# Altium PCB PCB_2_layers.PcbDoc
Units mil, origin at the board's own origin, x right, y up, seen from the top; angles counter-clockwise.
Board outline 1535 x 930 mil, 2 copper layers (Top Layer, Bottom Layer); 12 components, 8 nets, 36 pads, 6 vias.
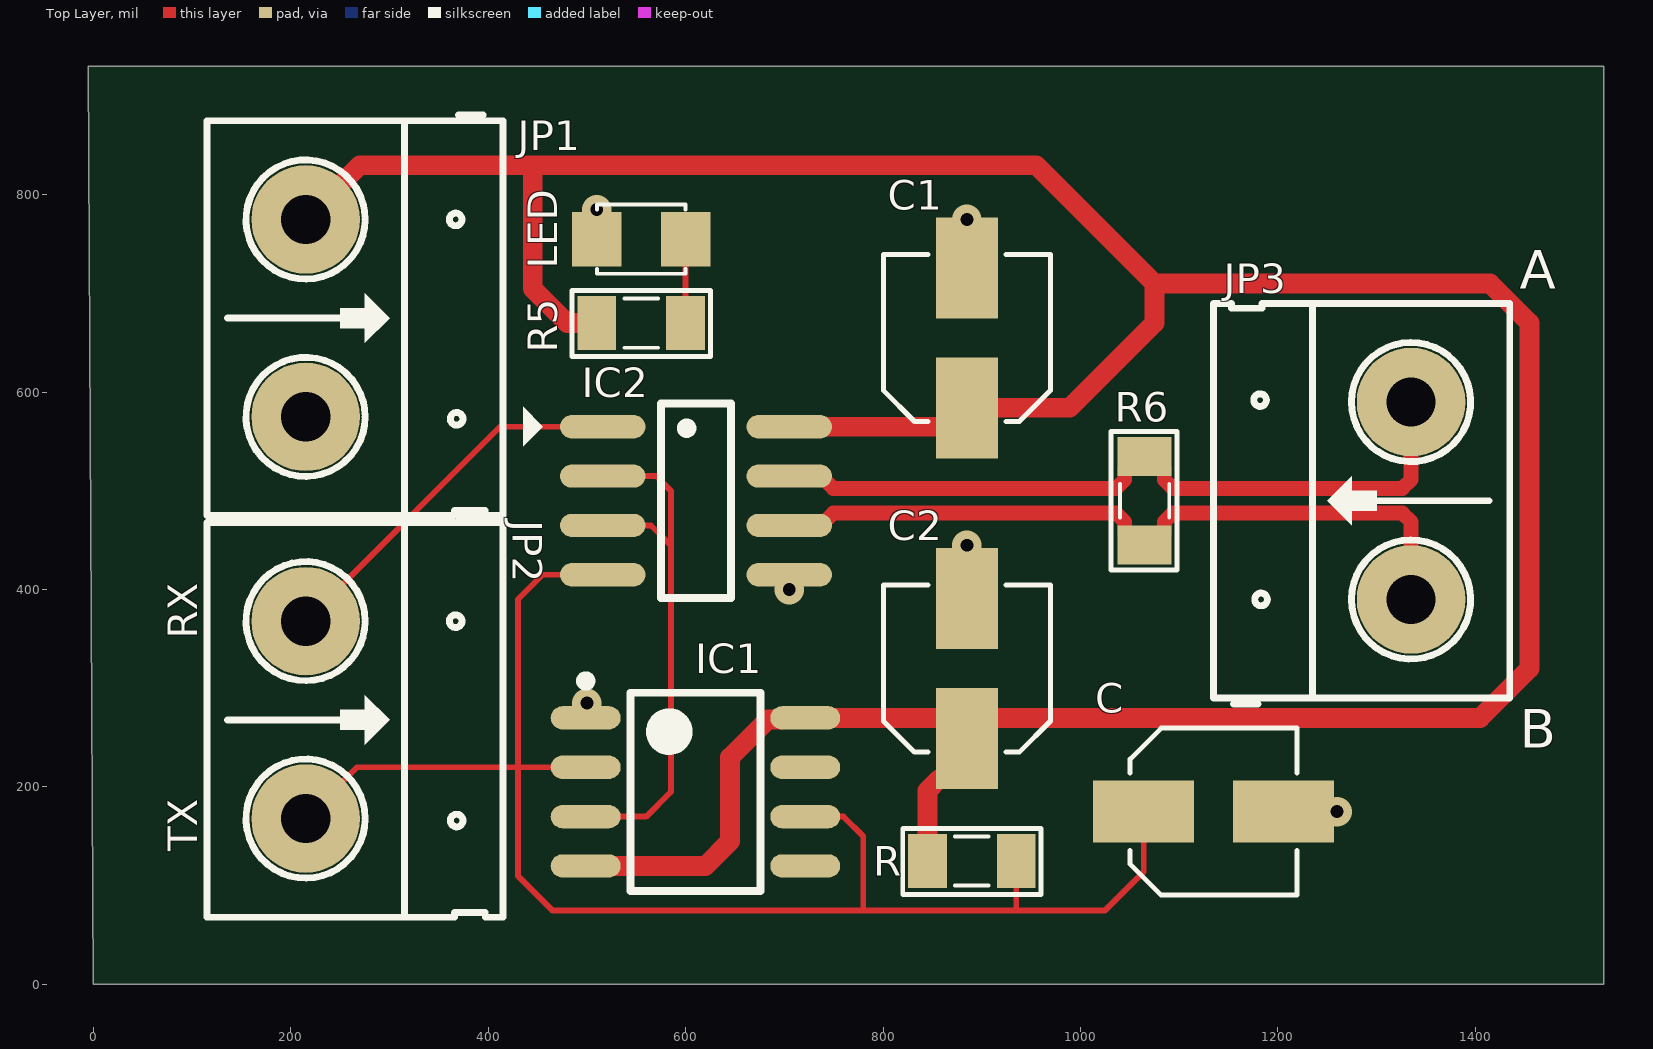
[diagram p0: Top Layer view]
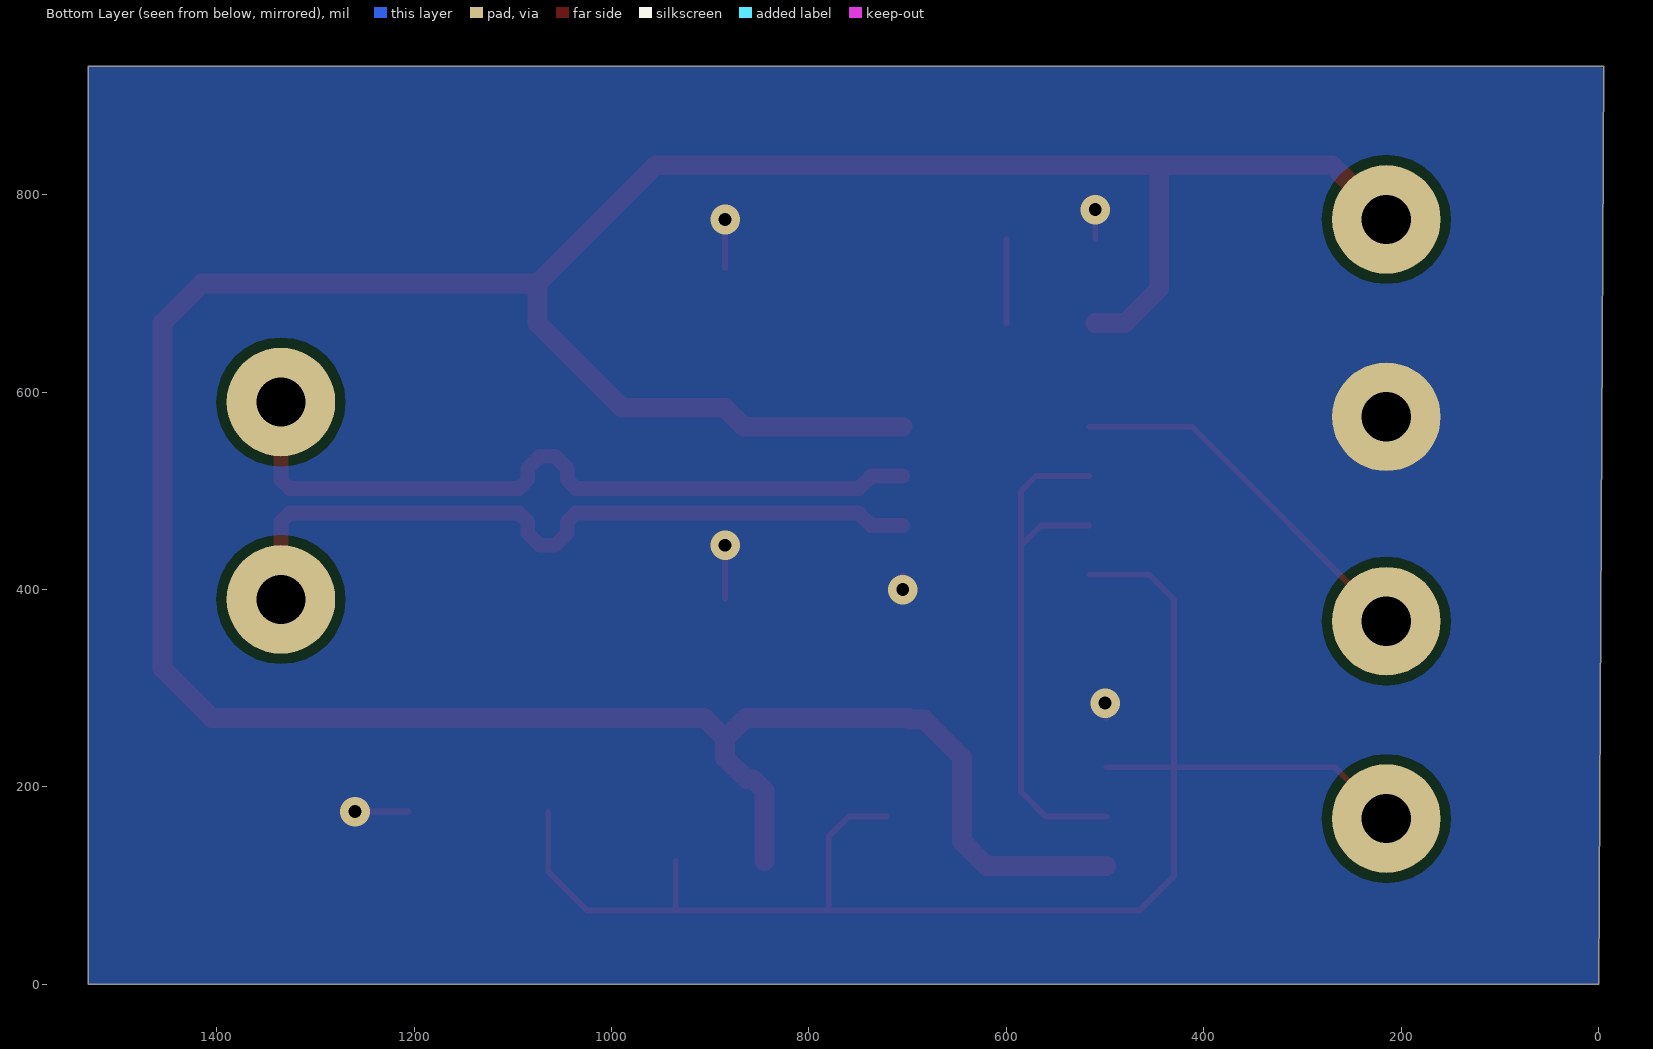
[diagram p1: Bottom Layer view, seen from below]
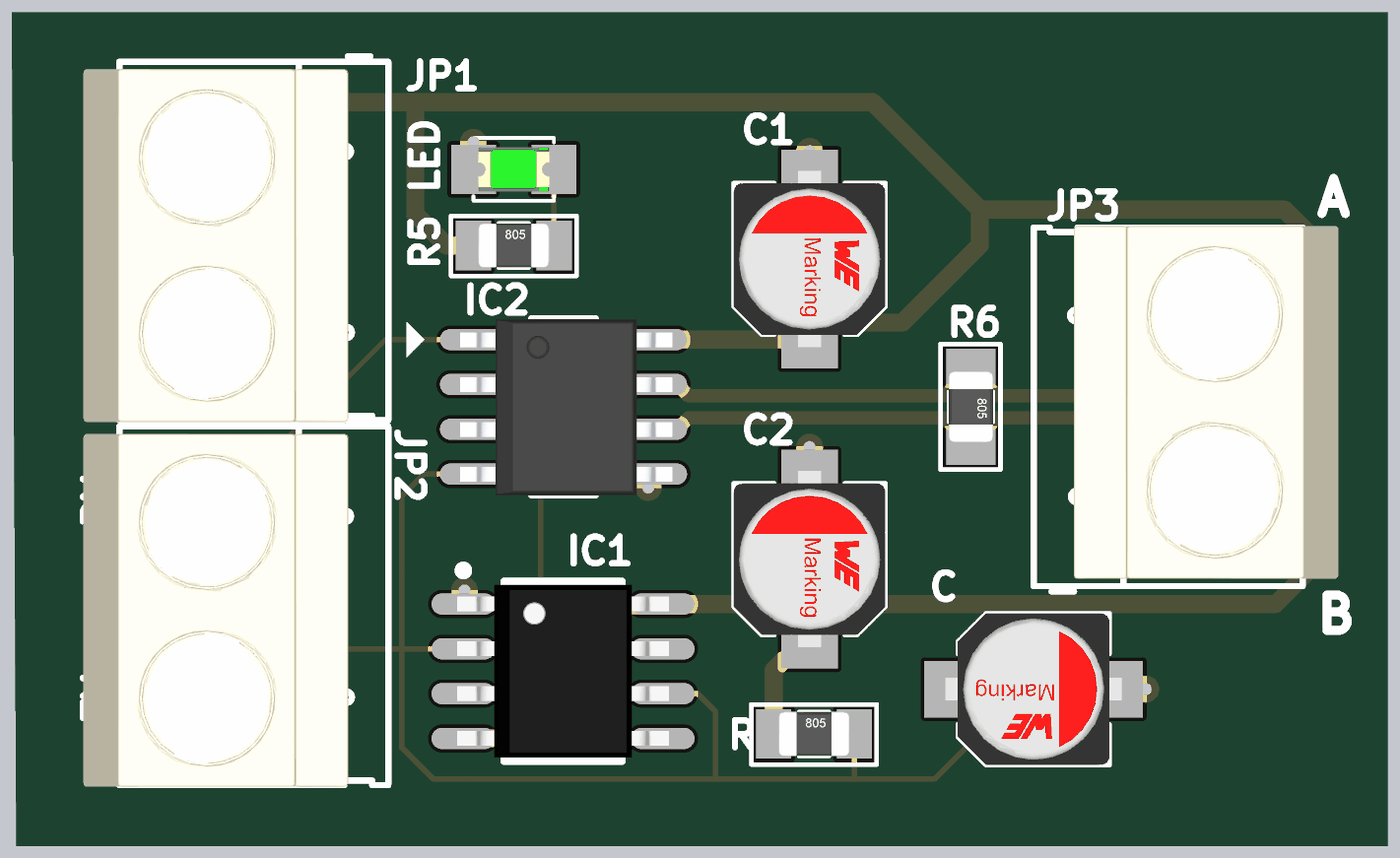
[diagram p2: 3D render of the assembled board from above, using the file's embedded part models]

## Layer stack, top to bottom
Top Solder: solder mask 0.4, Solder Resist, Dk 3.5
Top Layer: signal copper 1.4
Dielectric 1: dielectric 12.6, FR-4, Dk 4.8
Bottom Layer: signal copper 1.4
Bottom Solder: solder mask 0.4, Solder Resist, Dk 3.5

## Board outline
0,0 1530,0 1530,930 -5,930

## Design rules (kind name [scope] priority, off if disabled: settings)
Clearance Clearance_4 [InNamedPolygon('Bottom Layer-No Net')] p1: gap=10 ignorepadtopadclearanceinfootprint=FALSE except(0: Arc-Hole Track-Hole SMDPad-Hole THPad-Hole Via-Hole Fill-Hole Poly-Hole Region-Hole Text-Hole; 30: Arc-Fill Arc-Poly Arc-Region Track-Fill Track-Poly Track-Region Via-Fill Via-Poly Via-Region Fill-Fill Fill-Poly Fill-Region Poly-Poly Poly-Region Region-Region)
Clearance Clearance_3 [InNamedPolygon('Bottom Layer-No Net')] p2: gap=10 ignorepadtopadclearanceinfootprint=FALSE except(0: Arc-Hole Track-Hole SMDPad-Hole THPad-Hole Via-Hole Fill-Hole Poly-Hole Region-Hole Text-Hole; 20: Arc-Fill Arc-Poly Arc-Region Track-Fill Track-Poly Track-Region Via-Fill Via-Poly Via-Region Fill-Fill Fill-Poly Fill-Region Poly-Poly Poly-Region Region-Region)
Clearance Clearance_2 [InNamedPolygon('Bottom Layer-GND')] p3: gap=10 ignorepadtopadclearanceinfootprint=FALSE except(0: Arc-Hole Track-Hole SMDPad-Hole THPad-Hole Via-Hole Fill-Hole Poly-Hole Region-Hole Text-Hole; 39.37: Arc-Fill Arc-Poly Arc-Region Track-Fill Track-Poly Track-Region Via-Fill Via-Poly Via-Region Fill-Fill Fill-Poly Fill-Region Poly-Poly Poly-Region Region-Region)
Clearance Clearance_1 [InNamedPolygon('Bottom Layer-GND')] p4: gap=10 ignorepadtopadclearanceinfootprint=FALSE except(0: Arc-Hole Track-Hole SMDPad-Hole THPad-Hole Via-Hole Fill-Hole Poly-Hole Region-Hole Text-Hole; 39.37: Arc-Fill Arc-Poly Arc-Region Track-Fill Track-Poly Track-Region Via-Fill Via-Poly Via-Region Fill-Fill Fill-Poly Fill-Region Poly-Poly Poly-Region Region-Region)
Clearance [All] p5: gap=10 ignorepadtopadclearanceinfootprint=FALSE except(0: Arc-Hole Track-Hole SMDPad-Hole THPad-Hole Via-Hole Fill-Hole Poly-Hole Region-Hole Text-Hole)
DiffPairsRouting [All] p1: maxlimit=10 minlimit=10 mostfreqgap=10 toplayer_minwidth=15 toplayer_maxwidth=15 toplayer_prefwidth=15 bottomlayer_minwidth=15 bottomlayer_maxwidth=15 bottomlayer_prefwidth=15 maxuncoupledlength=500
PolygonConnect PolygonConnect_6 [All vs IsNamedPolygon('Bottom Layer-No Net')] p1: connectstyle=Direct reliefconductorwidth=10 reliefentries=4 polygonreliefangle="90 Angle" airgapwidth=10
PolygonConnect PolygonConnect_5 [All vs IsNamedPolygon('Bottom Layer-No Net')] p2: connectstyle=Relief reliefconductorwidth=20 reliefentries=4 polygonreliefangle="90 Angle" airgapwidth=10
PolygonConnect PolygonConnect_4 [All vs IsNamedPolygon('Bottom Layer-No Net')] p3: connectstyle=Relief reliefconductorwidth=20 reliefentries=4 polygonreliefangle="90 Angle" airgapwidth=20
PolygonConnect PolygonConnect_3 [All vs IsNamedPolygon('Bottom Layer-No Net')] p4: connectstyle=Relief reliefconductorwidth=10 reliefentries=4 polygonreliefangle="90 Angle" airgapwidth=20
PolygonConnect PolygonConnect_2 [All vs IsNamedPolygon('Bottom Layer-GND')] p5: connectstyle=Relief reliefconductorwidth=78.74 reliefentries=4 polygonreliefangle="90 Angle" airgapwidth=39.37
PolygonConnect PolygonConnect_1 [All vs IsNamedPolygon('Bottom Layer-GND')] p6: connectstyle=Relief reliefconductorwidth=78.74 reliefentries=4 polygonreliefangle="90 Angle" airgapwidth=39.37
PolygonConnect [All] p7: connectstyle=Relief reliefconductorwidth=10 reliefentries=4 polygonreliefangle="90 Angle" airgapwidth=10
RoutingVias [All] p1: holewidth=28 width=50 viastyle="Through Hole" minholewidth=28 minwidth=50 maxholewidth=28 maxwidth=50
SolderMaskExpansion [All] p1: expansion=4
Width [All] p1: maxlimit=78.74 minlimit=6 preferedwidth=39.37 toplayer_maxwidth=30 toplayer_prefwidth=20 bottomlayer_minwidth=19.68 minimp=50.000000 maximp=50.000000 favimp=50.000000
29 further rules are at their usual default settings.

## Classes and differential pairs
differential pair class RS485_DIFFPAIR: RS485
component class Schematic: C C1 C2 IC2 JP1 JP2 JP3 LED R R5 R6
differential pair RS485: +RS485_P -RS485_N

## Components (designator, comment, footprint, x,y, rotation, side; value= is the part's Value field where it differs from the comment)
C "22uF" CAP-ALU-SMD-4.5x5x1.4 1135,175 r0 top
C1 "22uF" CAP-ALU-SMD-4.5x5x1.4 885,655 r90 top
C2 "22uF" CAP-ALU-SMD-4.5x5x1.4 885,320 r90 top
IC1 "LM555" SO8 610,195 r0 top
IC2 "MAX485" SO-8 610.51,490 r0 top
JP1 "Header 2_1" HED2 215,775 r270 top value="Header 2"
JP2 "Header 2_1" HED2 215,368 r270 top value="Header 2"
JP3 "Header 2_1" HED2 1335,390 r90 top value="Header 2"
LED "LED SMD" SM-LED-0805-Green 600,755 r180 top
R "100" RES-SMD-0805 890,125 r0 top
R5 "220" RES-SMD-0805 555,670 r0 top
R6 "120" RES-SMD-0805 1065,490 r270 top

## Footprints (in the part's own frame and the unit in brackets; to place one, negate y for a bottom-side part, rotate by r counter-clockwise, add the part's x,y. Pads: shape width x height; smd on the part's side, far side on the other; paste and mask are expansions set on the pad)
CAP-ALU-SMD-4.5x5x1.4 [mm]
  rect 2.6x1.6 smd: 1(-1.8,0) 2(1.8,0)
  silkscreen extent -2.15,-2.15 2.15,2.15, body extent -2.5,-2.15 2.5,2.15, height 5.45
HED2 [mil] "Header 2, 2 pin, hight 300mil, Pin to Pin 200, Colour Green"
  round 110 hole 50: 1(0,0) 2(200,0)
  silkscreen extent -106,-100 300,200, body extent -92,-140 302,155, height 394
RES-SMD-0805 [mil]
  rect 39.37x55 smd: 1(-45,0) 2(45,0)
  silkscreen extent -70,-34 70,33, body extent -39,-25 39,25, height 31
SM-LED-0805-Green [mil]
  rect 50x55 smd: 1(0,0) 2(90,0)
  silkscreen extent 0,-35 90,35, body extent 5,-25 85,25, height 43
SO8 [mm] "SOIC, 8-Leads, Body 4.9x3.9mm, Pitch 1.27mm, IPC High Density"
  oval 1.8x0.6 smd: 1(-2.825,1.905) 2(-2.825,0.635) 3(-2.825,-0.635) 4(-2.825,-1.905) 5(2.825,-1.905) 6(2.825,-0.635) 7(2.825,0.635) 8(2.825,1.905)
  silkscreen extent -2.95,-2.55 1.68,2.98, body extent -2.99,-2.45 3,2.45, height 1.6
SO-8 [mm] "8-Pin Small Outline Integrated Circuit 1.27 mm Pitch, IPC Medium Density"
  oval 2.2x0.6 smd: 1(-2.4,1.905) 2(-2.4,0.635) 3(-2.4,-0.635) 4(-2.4,-1.905) 5(2.4,-1.905) 6(2.4,-0.635) 7(2.4,0.635) 8(2.4,1.905)
  silkscreen extent -4.44,-2.5 0.9,2.5, body extent -2.93,-2.51 3.08,2.49, height 1.75

## Part data
C C1 C2: library part CN-ALU-SMD, "Polarized Capacitor (Axial)", LatestRevisionDate=17-Jul-2002, LatestRevisionNote="Re-released for DXP Platform.", PackageReference=POLAR0.8, Published=8-Jun-2000, Publisher="Altium Limited"
IC1: "Timer"
IC2: "RS232 - RS485 (Same sn75176)"
JP1 JP2 JP3: "Header, 2-Pin", Manufacturer="Generic Components", Class=Connector
LED: library part LED-SMD-0805
R R5 R6: library part Res, "Res", Manufacturer="Generic Components", Class=Passive, Published=08/06/2000, Publisher="Altium Hobart Technology Centre", SubClass=R

## Via types
v1: diameter 30, hole 13, Top Layer to Bottom Layer, tented both sides, 6 vias

## Nets (pads, with @x,y where several pads share a name; then routed paths per layer and width w, separated by ;. In a path a pad name is that pad's centre, name@x,y a point inside that pad or via, vN(x,y) a via of type N, cw(c..) or ccw(c..) an arc to the next point about the centre after c; other vN are vias at no path point)
EN: IC1.3 IC2.2 IC2.3 | length 554
  Top Layer w6: IC1.3 560,170 585,195 585,445 ; IC2.3 565,465 585,445 ; IC2.2 570,515 585,500 585,445
GND: C1.2 C2.2 C.2 IC1.1 IC2.5 JP1.2 LED.2 | length 217.9
  Top Layer w6: IC1.1 498.78,283.78 v1(500,285) ; LED.2 v1(510,785) ; v1(705,400) IC2.5 ; C2.2 v1(885,445) ; C1.2 v1(885,775) ; C.2 v1(1260,175)
NetLED_1: LED.1 R5.2 | length 85
  Top Layer w6: R5.2 LED.1
RS485_N: IC2.7 JP3.2 R6.1 | length 758
  Top Layer w15: IC2.7 737.09,515 749.59,502.5 872.5,502.5 1036.21,502.5 1045,511.29 1045,522.82 1057.19,535 R6.1 1072.81,535 1085,522.82 1085,511.29 1093.79,502.5 1219.07,502.5 1326.21,502.5 1335,511.29 JP3.2
RS485_P: IC2.6 JP3.1 R6.2 | length 758
  Top Layer w15: IC2.6 737.09,465 749.59,477.5 882.85,477.5 1036.21,477.5 1045,468.71 1045,457.19 1057.19,445 R6.2 1072.81,445 1085,457.19 1085,468.71 1093.79,477.5 1208.71,477.5 1326.21,477.5 1335,468.71 JP3.1
RX: IC2.1 JP2.1 | length 382.6
  Top Layer w6: JP2.1 412,565 IC2.1
TX: C.1 IC1.2 IC1.6 IC2.4 JP2.2 R.2 | length 1599.5
  Top Layer w6: JP2.2 267,220 430,220 ; IC1.2 430,220 ; IC2.4 455,415 430,390 430,220 ; IC1.6 760,170 780,150 780,75 ; R.2 935,75 ; C.1 1064.13,114.13 1025,75 935,75 ; 430,220 430,110 465,75 780,75 ; 780,75 935,75
VCC: C1.1 C2.1 IC1.4 IC1.8 IC2.8 JP1.1 R5.1 R.1 | length 3587.9
  Top Layer w20: JP1.1 270,830 445,830 ; IC1.4 620,120 645,145 645,230 683.33,268.33 696.91,268.33 698.58,270 IC1.8 864.13,270 C2.1 ; R5.1 480,670 445,705 445,830 ; IC2.8 865.87,565 C1.1 989.13,584.13 1075,670 1075,710 ; R.1 845,196.24 856.71,207.95 863.5,207.95 885,229.45 C2.1 ; 445,830 955,830 1075,710 ; C2.1 905.87,270 1405,270 1455,320 1455,670 1415,710 1075,710
pads on no net: IC1.5 IC1.7

## Polygon pours and split planes (outlines as drawn)
GND on Bottom Layer "Bottom Layer-No Net" (solid, pour order 10): 0,0 1530,0 1530,930 -5,930

## Silkscreen, mask and mechanical layers (free items; w line width, h text height)
Top Overlay:
  text "A" at 1445,705 h39.37
  text "RX" at 105,350 h30 r90
  text "B" at 1445,240 h39.37
  text "TX" at 105,135 h30 r90